# Altium PCB MODULO CONTROL tentativo.PcbDoc
Units mm, origin at the board's own origin, x right, y up, seen from the top; angles counter-clockwise.
Board outline 72.01 x 57.91 mm, 2 copper layers (Top Layer, Bottom Layer); 28 components, 15 nets, 67 pads, 0 vias.
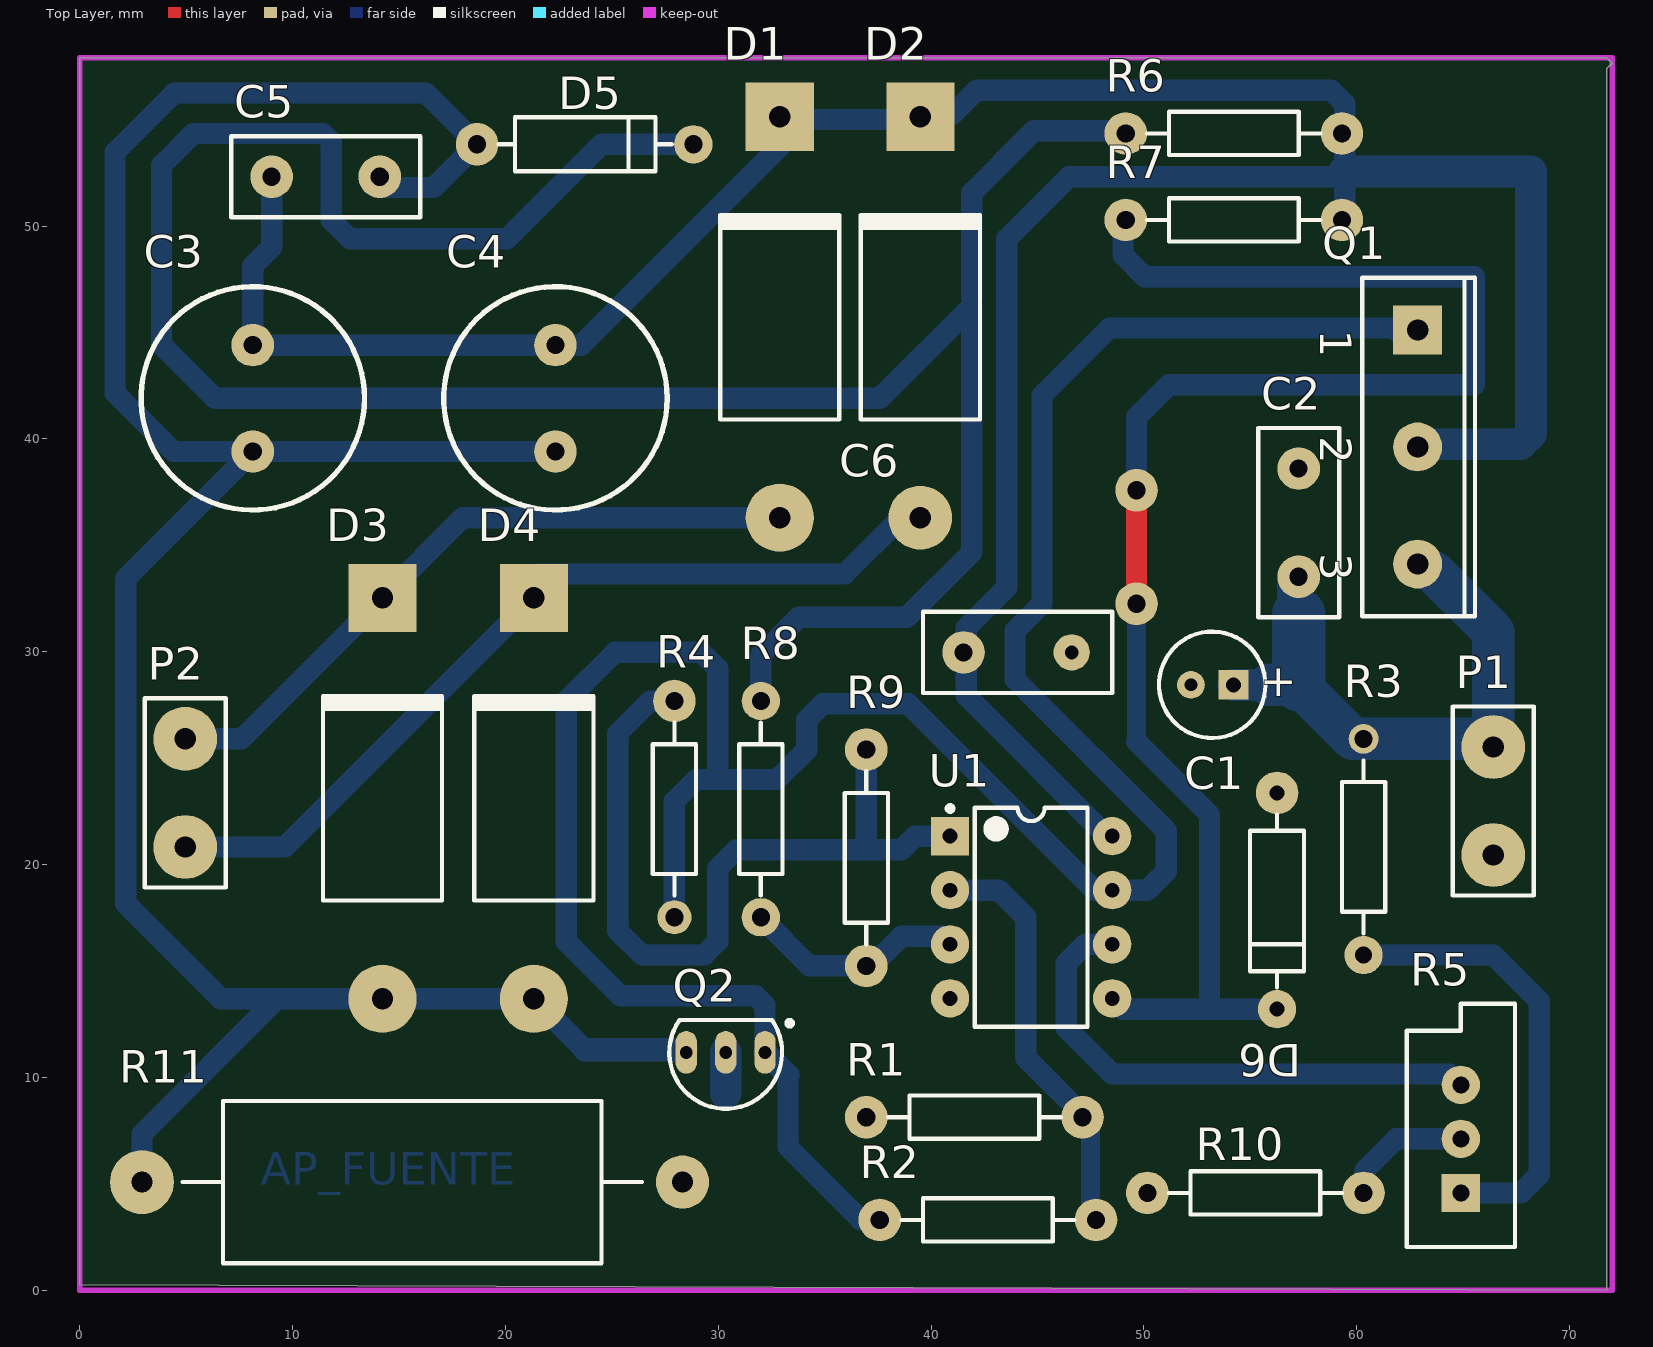
[diagram p0: Top Layer view]
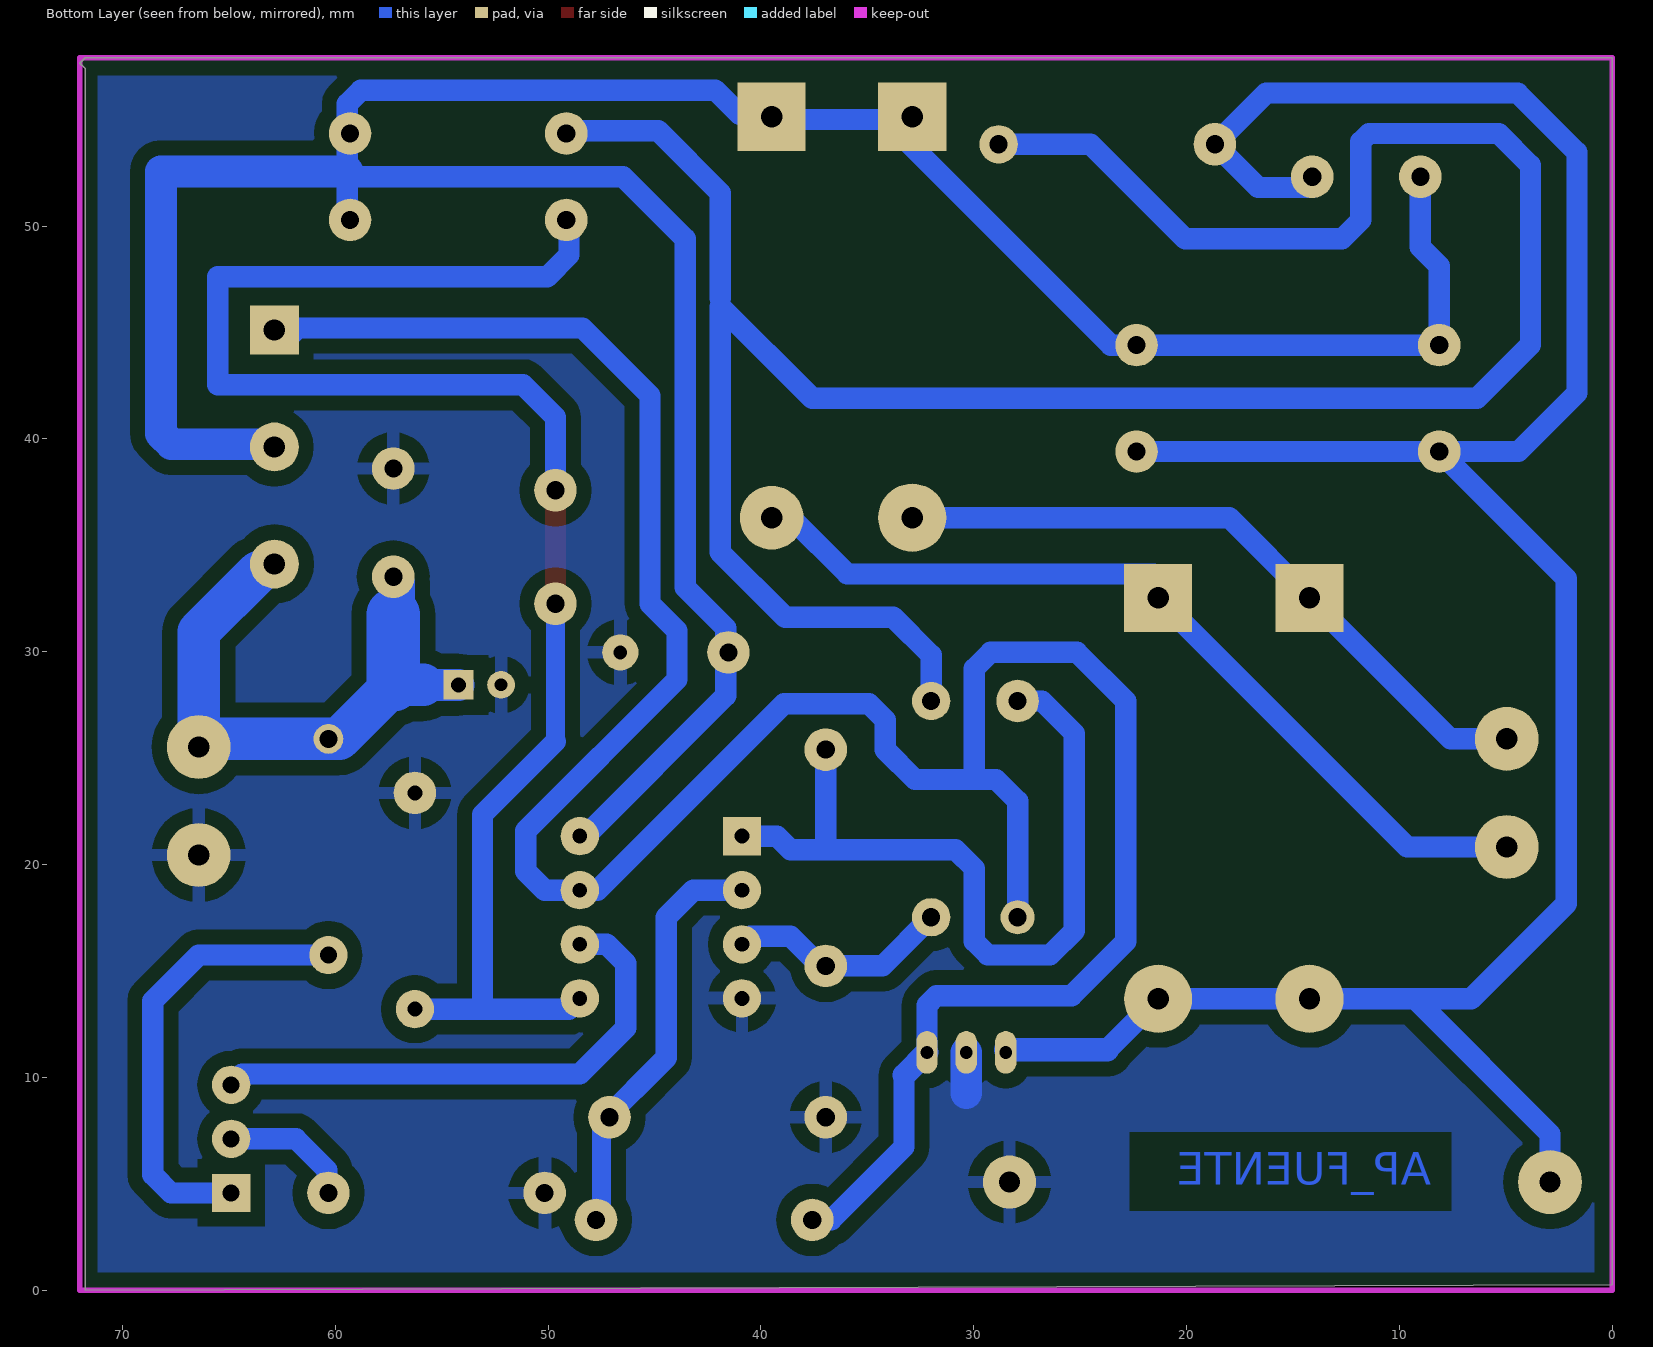
[diagram p1: Bottom Layer view, seen from below]

## Layer stack, top to bottom
Top Layer: signal copper 0.0356
Dielectric: dielectric 0.32, FR-4, Dk 4.8
Bottom Layer: signal copper 0.0356

## Board outline
0,0.254 0,57.912 71.755,57.912 72.009,57.658 71.755,57.404 71.755,0

## Design rules (kind name [scope] priority, off if disabled: settings)
Clearance [InNet('GND')] p1: gap=0.7
PlaneClearance [All] p1: clearance=0.02
PlaneConnect [All] p1: planeconnectstyle=Relief reliefexpansion=0.508 reliefentries=4 reliefconductorwidth=0.5 reliefairgap=0.2
PolygonConnect [All] p1: connectstyle=Relief reliefconductorwidth=0.6 reliefentries=4 polygonreliefangle="90 Angle"
RoomDefinition "MODULO CONTROL" [InComponentClass('MODULO CONTROL')] p1: confinementstyle=ConfineIn formatcopy=TRUE lockcomponents=FALSE outline -0.381,-1.27 73.66,-1.27 73.66,58.166 -0.381,58.166
RoutingCorners [All] p1: cornerstyle=45-Degree minsetback=2.54 maxsetback=10
RoutingLayers [All] p1: top layer_v5=FALSE bottom layer_v5=TRUE
RoutingVias [All] p1: holewidth=0.711 width=1.27 viastyle="Through Hole" minholewidth=0.711 minwidth=1.27 maxholewidth=0.711 maxwidth=1.27
SilkscreenOverComponentPads [All] p1: minsilkscreentomaskgap=0.254
SolderMaskExpansion [All] p1: expansion=0.5
Width Carga [(InNet('NetC1_1'))] p1: maxlimit=3 minlimit=0.1 preferedwidth=3 toplayer_minwidth=1.8 bottomlayer_prefwidth=2.7 minimp=50.000000 maximp=50.000000 favimp=50.000000
Width [All] p2: maxlimit=3 minlimit=0.7 preferedwidth=1 toplayer_minwidth=1 minimp=50.000000 maximp=50.000000 favimp=50.000000
23 further rules are at their usual default settings.

## Components (designator, comment, footprint, x,y, rotation, side; value= is the part's Value field where it differs from the comment)
C1 "Cap Pol1" CAPPR2-5x6.8 53.213,28.448 r180 top
C2 "Cap" RAD-0.2#1 57.277,36.068 r270 top
C3 "Cap Pol1" RB5-10.5 8.128,41.91 r270 top
C4 "Cap Pol1" RB5-10.5 22.352,41.91 r270 top
C5 "Cap" RAD-0.2#1 11.557,52.324 r180 top
C6 "Cap" RAD-0.2#2 44.069,29.972 r180 top
D1 "1N5408" DIO18.84-9.6x5.6#1 32.893,45.72 r90 top
D2 "1N5408" DIO18.84-9.6x5.6#2 39.497,45.72 r90 top
D3 "1N5408" DIO18.84-9.6x5.6#1 14.224,23.114 r90 top
D4 "1N5408" DIO18.84-9.6x5.6#1 21.336,23.114 r90 top
D5 "5.1V" DIODE-0.4#1 23.749,53.848 r0 top
D6 "D Zener" DIODE-0.4#2 56.261,18.288 r270 top
P1 "Header 2" RAD-0.2#3 66.421,22.987 r270 top
P2 "Header 2" RAD-0.2#3 4.953,23.368 r90 top
Q1 "TIP142" 340K-01 62.865,39.624 r270 top
Q2 "BC337" BCY-W3 30.353,11.176 r90 top
R1 "Res1" AXIAL-0.4#1 42.037,8.128 r0 top
R2 "Res1" AXIAL-0.4#1 42.672,3.302 r180 top
R3 "Res1" AXIAL-0.4#2 60.325,20.828 r90 top
R4 "Res1" AXIAL-0.4#3 27.94,22.606 r270 top
R5 "RPot" VR5 64.897,7.112 r90 top
R6 "Res1" AXIAL-0.4#1 54.229,54.356 r0 top
R7 "Res1" AXIAL-0.4#1 54.229,50.292 r0 top
R8 "Res1" AXIAL-0.4#4 32.004,22.606 r270 top
R9 "Res1" AXIAL-0.4#1 36.957,20.32 r90 top
R10 "Res1" AXIAL-0.4#1 55.245,4.572 r0 top
R11 "Res1" AXIAL-1.0 15.621,5.08 r0 top
U1 "LM358AN" N08E 44.704,17.526 r0 top

## Footprints (in the part's own frame and the unit in brackets; to place one, negate y for a bottom-side part, rotate by r counter-clockwise, add the part's x,y. Pads: shape width x height; smd on the part's side, far side on the other; paste and mask are expansions set on the pad)
340K-01 [mm] "SIP with Mounting Hole; 3 Leads; Body 20 x 15.6 x 5 mm (typ); Pitch 5.5 mm"
  rect 2.3x2.3 hole 1: 1(-5.5,0)
  round 2.3 hole 1: 2(0,0) 3(5.5,0)
  silkscreen extent -7.95,-2.6 7.95,2.7
AXIAL-0.4#1 [mm] "Axial Device, Thru-Hole; 2 Leads; 0.4 in Pin Spacing"
  round 2 hole 0.85: 1(-5.08,0) 2(5.08,0)
  silkscreen extent -4.06,-1.02 4.06,1.02
AXIAL-0.4#2 [mm] "Axial Device, Thru-Hole; 2 Leads; 0.4 in Pin Spacing"
  round 1.8 hole 0.8: 1(-5.08,0)
  round 1.4 hole 0.85: 2(5.08,0)
  silkscreen extent -4.06,-1.02 4.06,1.02
AXIAL-0.4#3 [mm] "Axial Device, Thru-Hole; 2 Leads; 0.4 in Pin Spacing"
  round 2 hole 0.85: 1(-5.08,0)
  round 1.6 hole 0.85: 2(5.08,0)
  silkscreen extent -4.06,-1.02 4.06,1.02
AXIAL-0.4#4 [mm] "Axial Device, Thru-Hole; 2 Leads; 0.4 in Pin Spacing"
  round 1.8 hole 0.85: 1(-5.08,0) 2(5.08,0)
  silkscreen extent -4.06,-1.02 4.06,1.02
AXIAL-1.0 [mm] "Axial Device, Thru-Hole; 2 Leads; 1.0 in Pin Spacing"
  round 3 hole 1: 1(-12.7,0)
  round 2.5 hole 1: 2(12.7,0)
  silkscreen extent -10.79,-3.81 10.79,3.81
BCY-W3 [mm] "TO, Flat Index; 3 In-Line, Axial Leads; Body Dia. 4.8mm; Leads 0.55 x 0.51 mm (max)"
  oval 2x1 hole 0.6: 1(0,-1.847) 2(0,0) 3(0,1.853)
  silkscreen extent -2.65,-3.13 1.52,2.65, body extent -2.66,-2.66 1.52,2.66, height 5.33
CAPPR2-5x6.8 [mm] "Capacitor, Electrolytic, Radial; Body 5 x 6.8 mm (Dia.xH typ); Pin Spacing 2 mm (typ)"
  rect 1.4x1.4 hole 0.7: 1(-1,0)
  round 1.3 hole 0.6: 2(1,0)
  silkscreen extent -2.5,-2.5 2.5,2.5
DIO18.84-9.6x5.6#1 [mm] "Diode, Axial; Body 9.5 x 5.6 mm (LxDia. max), Lead Dia. 1.32 mm (max)"
  round 3.2 hole 1: 1(-9.42,0)
  rect 3.2x3.2 hole 1: 2(9.42,0)
  silkscreen extent -4.8,-2.8 4.9,2.8
DIO18.84-9.6x5.6#2 [mm] "Diode, Axial; Body 9.5 x 5.6 mm (LxDia. max), Lead Dia. 1.32 mm (max)"
  round 3 hole 1: 1(-9.42,0)
  rect 3.2x3.2 hole 1: 2(9.42,0)
  silkscreen extent -4.8,-2.8 4.9,2.8
DIODE-0.4#1 [mm] "Diode, Thru-Hole; 2 Leads; 0.4 in Pin Spacing"
  round 2 hole 0.85: 1(-5.08,0)
  round 1.8 hole 0.85: 2(5.08,0)
  silkscreen extent -4.06,-1.27 4.06,1.27
DIODE-0.4#2 [mm] "Diode, Thru-Hole; 2 Leads; 0.4 in Pin Spacing"
  round 2 hole 0.7: 1(-5.08,0)
  round 1.8 hole 0.7: 2(5.08,0)
  silkscreen extent -4.06,-1.27 4.06,1.27
N08E [mm] "DIP, 8-Leads, Row Spacing 7.62mm, Pitch 2.54mm, Body 9.91x6.35mm"
  rect 1.8x1.8 hole 0.7: 1(-3.81,3.81)
  round 1.8 hole 0.7: 2(-3.81,1.27) 3(-3.81,-1.27) 4(-3.81,-3.81) 5(3.81,-3.81) 6(3.81,-1.27) 7(3.81,1.27) 8(3.81,3.81)
  silkscreen extent -3.93,-5.15 2.65,5.23, body extent -3.6,-5.15 3.6,5.15, height 5.34
RAD-0.2#1 [mm] "Radial Cap, Thru-Hole; 2 Leads; 0.2 in Pin Spacing"
  round 2 hole 0.85: 1(-2.54,0) 2(2.54,0)
  silkscreen extent -4.44,-1.91 4.44,1.91
RAD-0.2#2 [mm] "Radial Cap, Thru-Hole; 2 Leads; 0.2 in Pin Spacing"
  round 1.7 hole 0.65: 1(-2.54,0)
  round 2 hole 0.85: 2(2.54,0)
  silkscreen extent -4.44,-1.91 4.44,1.91
RAD-0.2#3 [mm] "Radial Cap, Thru-Hole; 2 Leads; 0.2 in Pin Spacing"
  round 3 hole 1: 1(-2.54,0) 2(2.54,0)
  silkscreen extent -4.44,-1.91 4.44,1.91
RB5-10.5 [mm] "Motor, General Kind; 2 Leads"
  round 2 hole 0.85: 1(-2.5,0) 2(2.5,0)
  silkscreen extent -5.25,-5.25 5.25,5.25
VR5 [mm] "Variable Resistor, Thru-Hole; 3 Leads"
  rect 1.8x1.8 hole 0.8: 1(-2.54,0)
  round 1.8 hole 0.8: 2(0,0) 3(2.54,0)
  silkscreen extent -5.08,-2.54 6.35,2.54

## Part data
C1 C3 C4: "Polarized Capacitor (Radial)"
C2 C5 C6: "Capacitor"
D1 D2 D3 D4: library part "Diode 1N5408", "3 Amp Medium Power Silicon Rectifier Diode"
D5: library part "D Zener", "Zener Diode"
D6: "Zener Diode"
P1 P2: "Header, 2-Pin"
Q1: library part NPN1, "NPN Darlington Bipolar Transistor"
Q2: library part NPN, "NPN Bipolar Transistor"
R1 R2 R3 R4 R6 R7 R8 R9 R10 R11: "Resistor"
R5: "Potentiometer"
U1: "Low Power Dual Operational Amplifier"

## Free pads (board coordinates)
  round 2 hole 0.85: 2(49.657,37.592) 3(49.657,32.258)

## Nets (pads, with @x,y where several pads share a name; then routed paths per layer and width w, separated by ;. In a path a pad name is that pad's centre, name@x,y a point inside that pad or via, vN(x,y) a via of type N, cw(c..) or ccw(c..) an arc to the next point about the centre after c; other vN are vias at no path point)
GND: C1.2 C2.1 C6.1 D6.1 P1.2 Q2.2 R1.1 R10.1 R11.2 U1.4 | length 1.9
  Bottom Layer w1.5: 30.353,9.271 Q2.2
NetC1_1: C1.1 C2.2 P1.1 Q1.3 R3.2 | length 26.8
  Bottom Layer w1: 56.769,32.385 C2.2@56.769,33.274
  Bottom Layer w1.5: C1.1 55.88,28.448
  Bottom Layer w2: 55.88,28.448 57.277,28.448 59.817,25.908 R3.2 P1.1@66.04,25.908 ; Q1.3@63.627,33.743 66.421,30.949 66.421,26.289 P1.1@66.04,25.908 ; P1.1 P1.1@66.04,25.908
  Bottom Layer w2.5: 57.277,28.448 57.277,31.75
NetC3_2: C3.2 C4.2 C5.1 D3.1 D4.1 D5.1 Q2.3 R11.1 | length 122.2
  Bottom Layer w1: R11.1@2.413,5.588 R11.1@2.921,5.588 ; R11.1 R11.1@2.921,5.588 ; R11.1@3.556,5.588 R11.1@2.921,5.588 ; D3.1@12.896,13.694 9.271,13.694 ; C5.1 14.097,51.816 16.637,51.816 D5.1 16.256,56.261 4.445,56.261 1.651,53.467 1.651,42.164 4.405,39.41 C3.2 ; D3.1 D4.1 23.732,11.298 ; C4.2 C3.2 ; R11.1@2.921,5.588 2.921,7.344 9.271,13.694 ; C3.2 2.159,33.441 2.159,18.161 6.626,13.694 9.271,13.694
  Bottom Layer w1.1: 23.732,11.298 Q2.3@28.5,11.298
NetD1_1: D1.1 D3.2 P2.2 | length 32.2
  Bottom Layer w1: P2.2 7.598,25.908 D3.2 17.99,36.3 D1.1
NetD2_1: D2.1 D4.2 P2.1 | length 41.9
  Bottom Layer w1: P2.1 9.63,20.828 D4.2@21.822,33.02 ; D4.2@20.911,33.02 21.546,33.655 35.941,33.655 38.586,36.3 D2.1
NetD5_2: D5.2 R6.1 R8.1 | length 120.1
  Bottom Layer w1: D5.2 24.511,53.848 20.066,49.403 12.7,49.403 11.811,50.292 11.811,53.975 11.43,54.356 5.334,54.356 3.835,52.857 3.835,44.425 6.35,41.91 37.592,41.91 41.91,46.228 41.91,34.671 38.862,31.623 33.782,31.623 32.004,29.845 R8.1 ; 41.91,46.609 41.91,51.562 44.831,54.483 48.387,54.483 48.514,54.356 R6.1
NetD6_2: D6.2 pad.2 pad.3 R7.1 U1.5 | length 76.6
  Top Layer w1: pad.3 pad.2
  Bottom Layer w0.9: 49.657,25.781 pad.3
  Bottom Layer w1: U1.5@49.022,13.208 53.086,13.208 ; R7.1@49.022,50.419 49.022,48.641 50.038,47.625 65.532,47.625 65.532,42.545 51.181,42.545 49.657,41.021 pad.2 ; 49.657,25.781 53.086,22.352 53.086,13.208 ; D6.2@56.134,13.208 53.086,13.208
NetQ1_2: Q1.1 Q2.1 R2.2 R4.2 U1.7 | length 128
  Bottom Layer w1: R4.2 27.94,22.987 28.956,24.003 29.845,24.003 ; Q2.1 32.2,13.393 31.75,13.843 25.4,13.843 22.86,16.383 22.86,27.686 25.146,29.972 29.21,29.972 29.972,29.21 29.972,24.003 32.766,24.003 34.163,25.4 34.163,26.797 34.925,27.559 38.914,27.559 47.677,18.796 U1.7 50.165,18.796 51.054,19.685 51.054,21.59 43.942,28.702 43.942,30.988 45.212,32.258 45.212,42.037 48.387,45.212 61.761,45.212 Q1.1@62.357,44.616 ; 33.274,10.102 33.274,6.731 36.703,3.302 R2.2
  Bottom Layer w1.1: Q2.1 33.274,10.102
NetR1_2: R1.2 R2.1 U1.2 | length 19.7
  Bottom Layer w0.9: R1.2@47.498,7.874 47.498,3.556 R2.1
  Bottom Layer w1: U1.2 43.18,18.796 44.45,17.526 44.45,10.922 R1.2@47.498,7.874
NetR3_1: R3.1 R5.1 | length 21.5
  Bottom Layer w1: R3.1@60.325,15.494 60.579,15.748 66.421,15.748 68.58,13.589 68.58,5.432 67.72,4.572 R5.1
NetR4_1: R4.1 R9.2 U1.1 | length 37.8
  Bottom Layer w1: R4.1 26.797,27.686 25.273,26.162 25.273,16.891 26.416,15.748 29.337,15.748 29.972,16.383 29.972,19.812 30.861,20.701 36.703,20.701 ; R9.2 36.957,20.955 36.703,20.701 ; U1.1 39.243,21.336 38.608,20.701 36.703,20.701
NetR5_2: R5.2 R10.2 | length 6.2
  Bottom Layer w1: R10.2 60.389,4.635 60.389,5.651 61.849,7.112 R5.2
NetR5_3: R5.3 U1.6 | length 25.2
  Bottom Layer w1: U1.6 47.244,16.256 46.355,15.367 46.355,12.319 48.514,10.16 64.389,10.16 R5.3
NetR8_2: R8.2 R9.1 U1.3 | length 10.6
  Bottom Layer w1: R8.2 34.29,15.24 R9.1 37.211,15.24 38.608,16.637 40.513,16.637 U1.3
VCC: C3.1 C4.1 C5.2 C6.2 D1.2 D2.2 Q1.2 R6.2 R7.2 U1.8 | length 146.2
  Bottom Layer w1: C5.2 9.017,49.022 8.128,48.133 C3.1 C4.1 23.56,44.41 33.02,53.87 33.02,55.013 D2.2@39.624,55.013 ; D2.2 D2.2@39.497,55.245 ; D2.2@39.878,55.245 40.999,55.245 42.142,56.388 58.801,56.388 59.436,55.753 59.436,50.419 R7.2@59.563,50.292 ; 46.482,52.324 43.561,49.403 43.561,33.02 41.656,31.115 41.656,27.94 48.26,21.336 U1.8 ; 46.609,52.324 59.436,52.324
  Bottom Layer w1.5: 59.436,52.578 68.199,52.578 68.199,40.259 67.691,39.751 63.5,39.751 63.373,39.624 Q1.2

## Polygon pours and split planes (outlines as drawn)
GND on Bottom Layer "GND" (solid, remove dead copper): 0,0 0,57.404 0.508,57.912 0.762,57.658 72.009,57.658 72.009,0.254 71.755,0

## Keep-outs
Keep-Out Layer:
  lines w0.254: 0,0 72.009,0 72.009,57.912 0,57.912 0,0

## Other copper
Bottom Layer:
  text "AP_FUENTE" at 8.509,4.953 h1.52

## Text inside footprints (layer, text, board x,y; h text height)
C1: Top Overlay "+" at 57.188,29.198 h1.5 r180
Q1: Top Overlay "1" at 58.29,45.124 h1.5 r270; Top Overlay "2" at 58.29,40.132 h1.5 r270; Top Overlay "3" at 58.29,34.632 h1.5 r270